# EAGLE board PR5002-S (EAGLE 6.5.0)
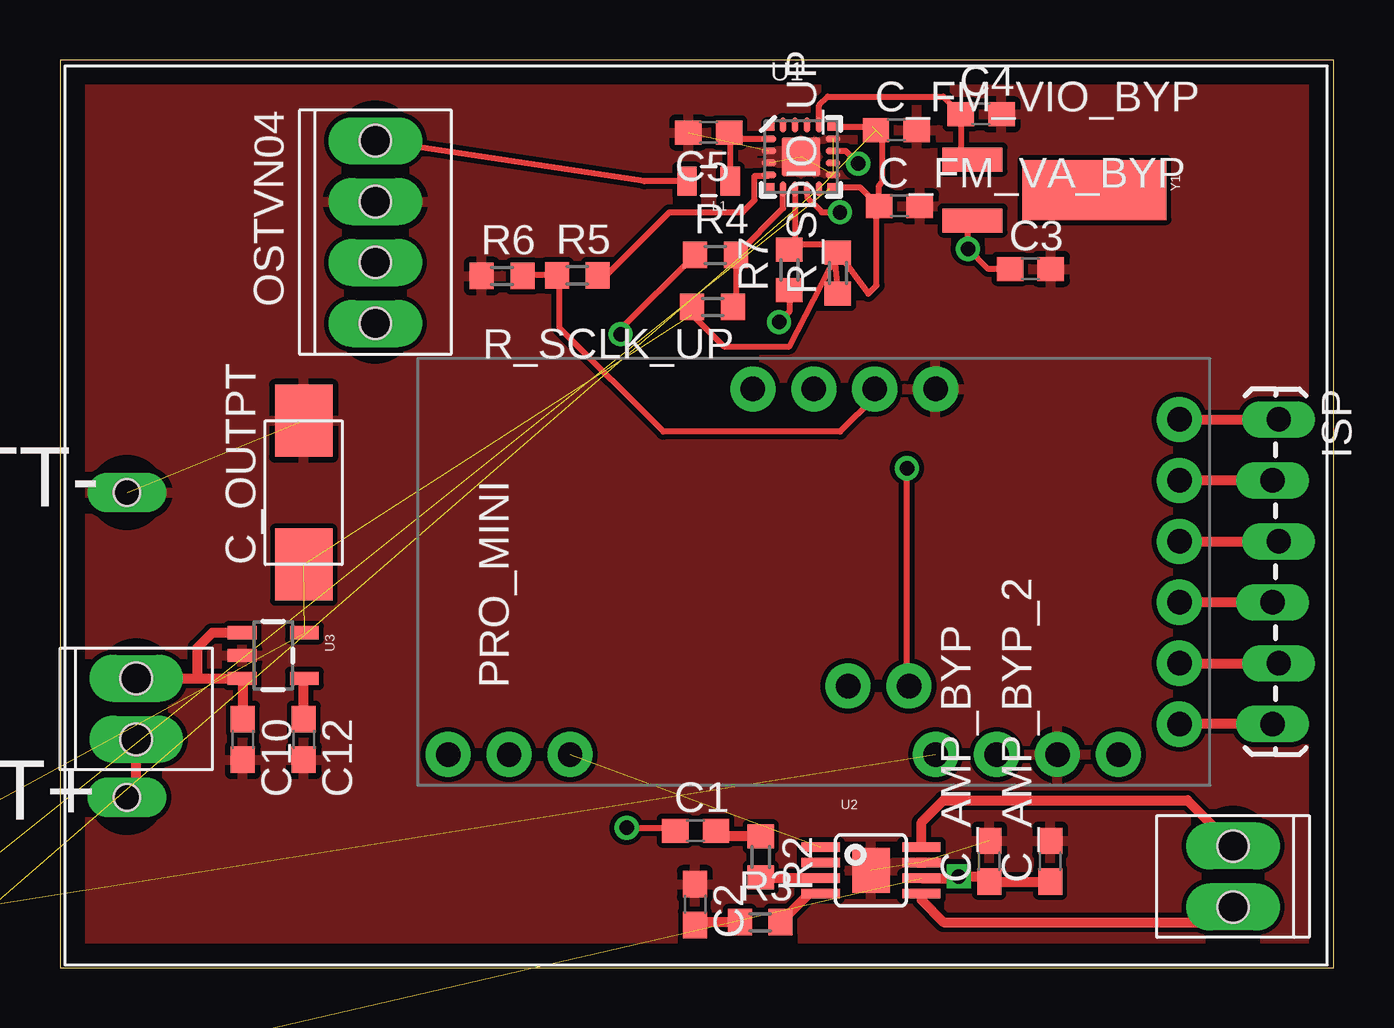
[diagram p0: board, top side]
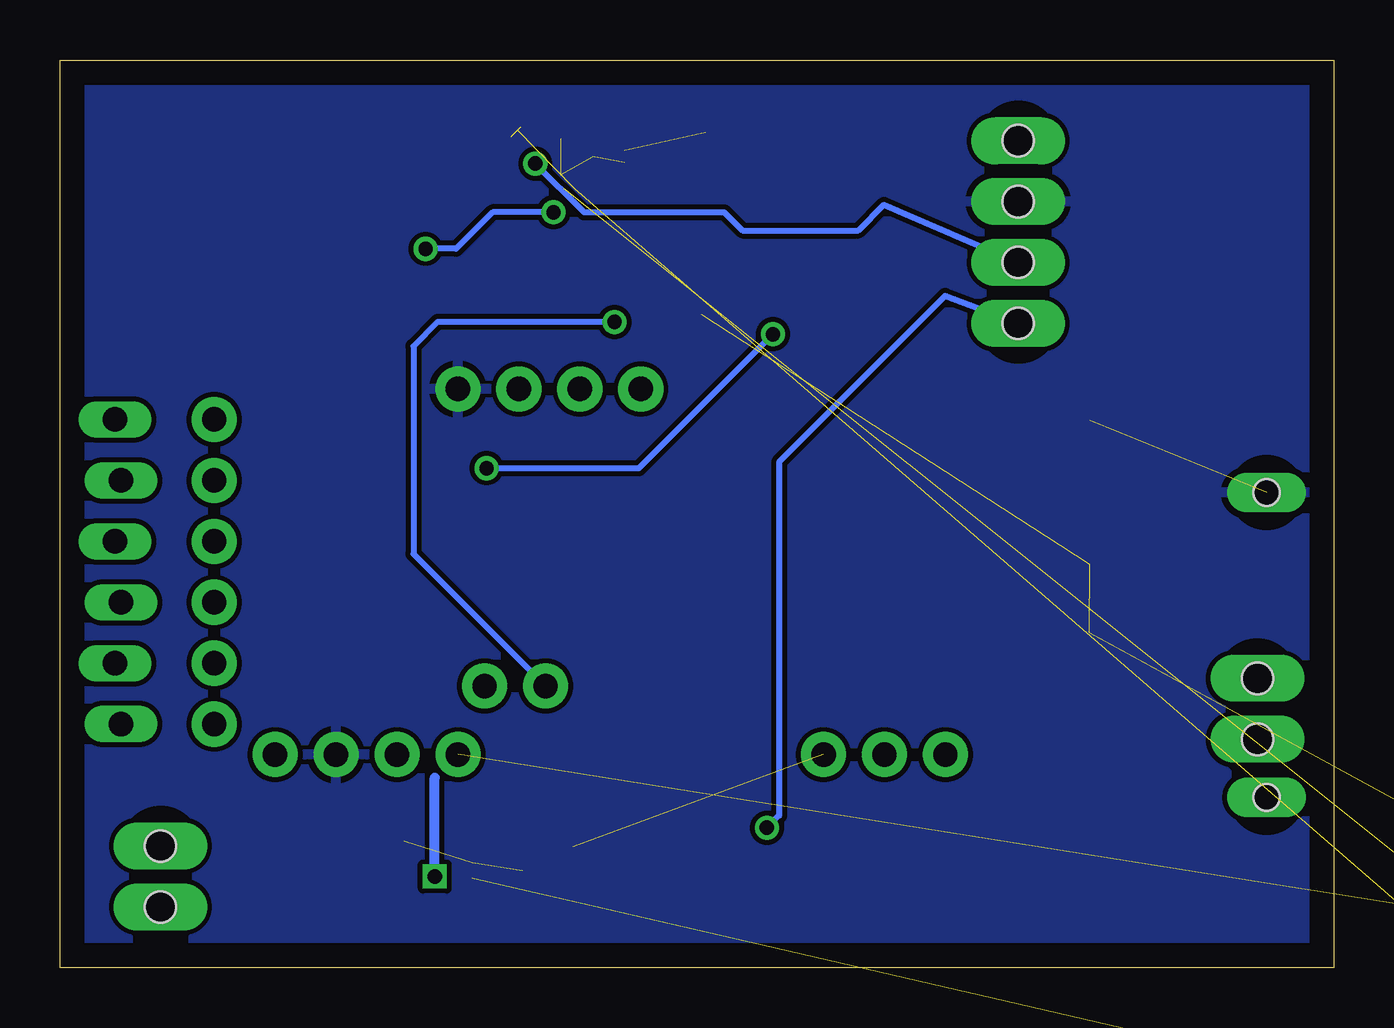
[diagram p1: board, bottom side, seen from below]

Size 53.09 x 37.85 mm. Coordinates in mm from the lower left corner, seen from the top.
Outline: 0,0 53.09,0 53.09,37.85 0,37.85 0,0
Copper layers (1*16): Top 0.035mm / dielectric 1.5mm / Bottom 0.035mm
Design rules "default": minimum track width 10mil, minimum drill 24mil, track to track 8mil, track to pad 8mil, pad to pad 8mil, via to via 8mil, smd to smd 8mil, copper to edge 40mil, drill to drill 8mil, minimum pad ring 10mil, minimum via ring 8mil, stop-mask expansion 4mil, vias tented up to drill 0mil, thermal gap 10mil
Net classes: 1 GND: width 0.61 mm

## Footprints (pad centres in the part's own frame; a part is rotated, then mirrored left to right if it is on the bottom)
OSTVN04 = drill 1.3 long: P$1 -3.81,0; P$2 -1.27,0; P$3 1.27,0; P$4 3.81,0 | hole 1.3: -1.27,0; 1.27,0; 3.81,0; -3.81,0
KEYSTONE_2479_3XAAA_BOTTOM = drill 1.1 long: BATT+ 0,-6.35; BATT- 0,6.35 | hole 1.1: 0,-6.35; 0,6.35
C0603 = smd 1.1 x 1: 1 -0.85,0; 2 0.85,0
VISHAY_TR3C = smd 3 x 2.4: P$1 -3,0; P$2 3,0
1X06_LOCK_LONGPADS = drill 1.016 long: 1 0,0; 2 2.54,-0.254; 3 5.08,0; 4 7.62,-0.254; 5 10.16,0; 6 12.7,-0.254
0805 = smd 0.8 x 1.2: 1 -0.9,0; 2 0.9,0
0603 = smd 1.1 x 1: 1 -0.85,0; 2 0.85,0
OSTVN02 = drill 1.3 long: P$1 -1.27,0; P$2 1.27,0 | hole 1.3: -1.27,0; 1.27,0
ARDUINO_PRO_MINI = drill 1.016 pad 1.88: 4 -7.62,5.08; 5 -7.62,2.54; 6 -7.62,0; 7 -7.62,-2.54; 13 7.62,-15.24; 14 7.62,-12.7; 15 7.62,-10.16; 21 7.62,5.08; 22 7.62,7.62; 23 7.62,10.16; 24 7.62,12.7; A4 4.763,1.429; A5 4.763,3.969; BLK -6.35,15.24; GND -3.81,15.24; GRN 6.35,15.24; RXI 1.27,15.24; TXO 3.81,15.24; VCC -1.27,15.24
R0603 = smd 1 x 1.1: 1 -0.85,0; 2 0.85,0
SI470X = smd 0.34 x 0.34: 1 -1.275,1.265; 6 -1.265,-1.265; 11 1.265,-1.265; 16 1.265,1.265 | smd 0.61 x 0.28: 2 -1.335,0.75; 3 -1.335,0.25; 4 -1.335,-0.25; 5 -1.335,-0.75; 12 1.335,-0.75; 13 1.335,-0.25; 14 1.335,0.25; 15 1.335,0.75 | smd 0.28 x 0.61: 7 -0.75,-1.335; 8 -0.25,-1.335; 9 0.25,-1.335; 10 0.75,-1.335; 17 0.75,1.335; 18 0.25,1.335; 19 -0.25,1.335; 20 -0.75,1.335 | smd 1.6 x 1.6: 21 0,0
POWER-SOP8 = smd 0.4 x 1.6: 1 -0.975,-2.1; 2 -0.325,-2.1; 3 0.325,-2.1; 4 0.975,-2.1; 5 0.975,2.1; 6 0.325,2.1; 7 -0.325,2.1; 8 -0.975,2.1 | smd 1.89 x 1.57: 9 0,0
SOT23-5 = smd 0.55 x 1.2: 1 -0.95,-1.3; 2 0,-1.3; 3 0.95,-1.3; 4 0.95,1.3; 5 -0.95,1.3
CRYSTAL-32KHZ-SMD = smd 2.5 x 6: SHEILD 0,5.08 | smd 1 x 2.5: X1 -1.27,0; X2 1.27,0

## Placement (x,y rotation side)
ANT/POT_VOL  OSTVN04  [OSTVN04]  13.14,30.67 270 top
BATT_IN  KEYSTONE_2479_3XAAA_BOTTOM  [KEYSTONE_2479_3XAAA_BOTTOM]  2.79,13.46 0 top
C1  1uF  [C0603]  26.49,5.71 0 top
C2  1uF  [C0603]  26.47,2.64 270 top
C3  22pF  [C0603]  40.45,29.13 0 top
C4  22pF  [C0603]  38.39,35.59 0 top
C5  4.7pF  [C0603]  27.04,34.82 180 top
C10  1uF  [C0603]  7.62,9.53 270 top
C12  470pF  [C0603]  10.16,9.53 270 top
C_AMP_BYP  1uF  [C0603]  38.73,4.45 90 top
C_AMP_BYP_2  10uF  [C0603]  41.27,4.45 90 top
C_FM_VA_BYP  22nF  [C0603]  34.99,31.75 0 top
C_FM_VIO_BYP  100nF  [C0603]  34.86,34.92 0 top
C_OUTPT  2.2uF  [VISHAY_TR3C]  10.16,19.81 90 top
ISP  [1X06_LOCK_LONGPADS]  50.8,22.86 270 top
L1  [0805]  27.04,32.79 180 top
L2  [0603]  -12.19,1.27 0 top  (outside the outline)
L5  [0603]  -11.94,-7.11 0 top  (outside the outline)
L_FM_VA  [0603]  -11.94,-2.03 0 top  (outside the outline)
L_FM_VIO  [0603]  -11.94,-4.57 0 top  (outside the outline)
POT_SW  [OSTVN02]  3.17,10.79 270 top
PRO_MINI  ARDUINO_PRO_MINI  [ARDUINO_PRO_MINI]  31.42,16.51 270 top
R2  59k  [R0603]  29.21,4.62 270 top
R3  59K  [R0603]  29.18,1.91 0 top
R4  330  [R0603]  27.32,29.72 0 top
R5  330  [R0603]  21.56,28.87 0 top
R6  10K  [R0603]  18.43,28.84 0 top
R7  330  [R0603]  30.4,29.1 90 top
R_SCLK_UP  4.7K  [R0603]  27.2,27.55 180 top
R_SDIO_UP  4.7K  [R0603]  32.42,28.96 90 top
SPKR  [OSTVN02]  48.9,3.81 90 top
U1  SI470X  [SI470X]  30.89,33.81 0 top
U2  TPA2005D1DGN  [POWER-SOP8]  33.81,4.06 270 top
U3  MIC5219 3.3V  [SOT23-5]  8.89,13.02 270 top
Y1  32.768KHz  [CRYSTAL-32KHZ-SMD]  38.04,32.42 270 top

## Library data of the parts
ANT/POT_VOL POT_SW SPKR = OSTVN On-Shore Term
BATT_IN = Batteries
C1-C5 C10 C12 C_AMP_BYP C_AMP_BYP_2 C_FM_VA_BYP C_FM_VIO_BYP R2-R7 R_SCLK_UP R_SDIO_UP = resistor
C_OUTPT = capacitor-wima
ISP = SparkFun-Connectors
L1 L2 L5 L_FM_VA L_FM_VIO = SparkFun-Passives
PRO_MINI = Sparkfun_MODIFIED
U1 = SparkFun-RF
U2 = SparkFun-AnalogIC
U3 = SparkFun-PowerIC; PROD_ID: VREG-09872
Y1 = SparkFun-FreqCtrl; PROD_ID: XTAL-07894

## Nets
ANT: ANT/POT_VOL.P$1 L1.2
BATT+: BATT_IN.BATT+ POT_SW.P$2
GND [GND]: ANT/POT_VOL.P$2 BATT_IN.BATT- C2.1 C3.2 C4.2 C5.2 C10.2 C12.2 C_AMP_BYP.2 C_AMP_BYP_2.2 C_FM_VA_BYP.2 C_FM_VIO_BYP.2 C_OUTPT.P$2 PRO_MINI.4 PRO_MINI.23 R6.1 U1.3 U1.4 U1.12 U1.15 U1.21 U2.7 U2.9 U3.2
N$1: C2.2 R3.1
N$2: C1.2 R2.1
N$3: C3.1 U1.9 Y1.X2
N$4: R5.2 U1.5
N$5: PRO_MINI.A5 R4.1
N$6: R4.2 R_SCLK_UP.1 U1.7
N$7: PRO_MINI.A4 R7.1
N$8: PRO_MINI.5 R5.1 R6.2
N$9: R7.2 R_SDIO_UP.1 U1.8
N$10: C5.1 L1.1 U1.2
N$11: C4.1 U1.17 Y1.X1
N$12: ISP.6 PRO_MINI.GRN
N$13: ISP.5 PRO_MINI.TXO
N$14: R2.2 U2.3
N$15: R3.2 U2.4
N$16: SPKR.P$2 U2.8
N$17: SPKR.P$1 U2.5
N$18: ISP.4 PRO_MINI.RXI
N$19: ANT/POT_VOL.P$3 U1.14
N$20: C10.1 POT_SW.P$1 U3.1 U3.3
N$21: ISP.3 PRO_MINI.VCC
N$22: ISP.2 PRO_MINI.GND
N$23: ISP.1 PRO_MINI.BLK
N$25: PRO_MINI.15 U2.1
N$27: ANT/POT_VOL.P$4 C1.1
N$28: C12.1 U3.4
N$29: L2.2 PRO_MINI.21
N$30: C_FM_VIO_BYP.1 L_FM_VIO.2 U1.10
N$31: C_FM_VA_BYP.1 L_FM_VA.2 U1.11 U1.16
N$33: C_AMP_BYP.1 C_AMP_BYP_2.1 L5.2 U2.6
VCC: C_OUTPT.P$1 L2.1 L5.1 L_FM_VA.1 L_FM_VIO.1 R_SCLK_UP.2 R_SDIO_UP.2 U3.5

## Tracks (layer width: path | path; a pad name or v marks a point on that pad's centre or on a via)
ANT
  Top 0.254: L1.2 24.36,32.79 ANT/POT_VOL.P$1
BATT+
  Top 0.406: BATT_IN.BATT+ 3.17,7.49 POT_SW.P$2
GND  (7 unrouted)
  pour Top: 0,0 0,37.85 53.09,37.85 53.09,0
  pour Bottom: 0,0 0,37.85 53.09,37.85 53.09,0
N$1
  Top 0.406: R3.1 26.58,1.91 C2.2
N$2
  Top 0.406: R2.1 27.58,5.47 C1.2
N$3  (via drill 0.6)
  Top 0.254: U1.9 31.14,32.11 31.75,31.5 v32.51,31.5 | Y1.X2 37.85,30.96 v37.85,29.97 38.68,29.13 C3.1
  Bottom 0.254: v32.51,31.5 35.05,31.5 36.58,29.97 v37.85,29.97
N$4
  Top 0.254: R5.2 22.77,28.87 25.4,31.5 28.45,31.5 28.96,32 28.96,33.02 29.51,33.02 U1.5
N$5  (via drill 0.6)
  Top 0.254: PRO_MINI.A5 35.31,11.83 v35.31,20.83 | v23.37,26.42 23.37,26.62 R4.1
  Bottom 0.254: v35.31,20.83 28.96,20.83 v23.37,26.42
N$6
  Top 0.254: U1.7 30.14,31.66 28.19,29.72 R4.2 28.17,27.66 R_SCLK_UP.1
N$7  (via drill 0.6)
  Top 0.254: R7.1 30.4,27.36 v29.97,26.92
  Bottom 0.254: v29.97,26.92 37.34,26.92 38.35,25.91 38.35,17.25 PRO_MINI.A4
N$8
  Top 0.254: R6.2 19.3,28.87 R5.1 20.83,28.75 20.83,26.67 25.15,22.35 32.51,22.35 33.96,23.8 PRO_MINI.5
N$9
  Top 0.254: U1.8 30.64,30.18 | 30.64,30.18 R7.2 | 30.64,30.18 32.23,30.18 R_SDIO_UP.1
N$10
  Top 0.254: L1.1 27.94,34.77 C5.1 28.15,34.56 U1.2
N$11
  Top 0.254: U1.17 31.64,35.95 32,36.32 36.81,36.32 C4.1 37.54,34.19 Y1.X1
N$12
  Top 0.406: ISP.6 PRO_MINI.GRN
N$13
  Top 0.406: PRO_MINI.TXO ISP.5
N$14
  Top 0.406: U2.3 29.24,3.74 R2.2
N$15
  Top 0.406: U2.4 31.22,3.09 R3.2
N$16
  Top 0.406: U2.8 35.91,6.06 36.83,6.99 46.99,6.99 SPKR.P$2
N$17
  Top 0.406: U2.5 35.91,2.83 36.83,1.91 48.26,1.91 SPKR.P$1
N$18
  Top 0.406: ISP.4 PRO_MINI.RXI
N$19  (via drill 0.6)
  Top 0.254: U1.14 32.74,34.06 v33.27,33.53
  Bottom 0.254: v33.27,33.53 31.24,31.5 25.4,31.5 24.64,30.73 19.81,30.73 18.73,31.81 ANT/POT_VOL.P$3
N$20
  Top 0.406: POT_SW.P$1 5.71,12.07 | 5.71,12.07 U3.3 7.62,12.04 C10.1 | U3.1 6.35,13.97 5.71,13.34 5.71,12.07
N$21
  Top 0.406: PRO_MINI.VCC ISP.3
N$22
  Top 0.406: ISP.2 PRO_MINI.GND
N$23
  Top 0.406: PRO_MINI.BLK ISP.1
N$25  (1 unrouted)
N$27  (via drill 0.6)
  Top 0.254: v23.62,5.84 25.52,5.84 C1.1
  Bottom 0.254: ANT/POT_VOL.P$4 16.19,28 23.11,21.08 23.11,6.35 v23.62,5.84
N$28
  Top 0.406: C12.1 10.16,12.04 U3.4
N$29  (1 unrouted)
N$30  (2 unrouted)
N$31  (2 unrouted)
  Top 0.254: U1.16 33.86,35.07 | 34.29,34.65 34.29,32.77 34.14,32.61 C_FM_VA_BYP.1 33.35,32.54 U1.11 32.08,32.47
N$33  (via drill 0.6)  (1 unrouted)
  Top 0.406: U2.6 37.39,3.74 v37.47,3.81 38.52,3.81 C_AMP_BYP.1 C_AMP_BYP_2.1
  Bottom 0.406: v37.47,3.81 37.47,7.92
VCC  (6 unrouted)
  Top 0.254: 34.04,31.65 34.04,28.45 33.69,28.11 R_SDIO_UP.2 30.4,25.91 27.69,25.91 26.35,27.24 R_SCLK_UP.2